# Altium PCB LM2596.PcbDoc
Units mm, origin at the board's own origin, x right, y up, seen from the top; angles counter-clockwise.
Board outline 48.51 x 33.02 mm, 2 copper layers (Top Layer, Bottom Layer); 7 components, 5 nets, 26 pads, 79 vias.
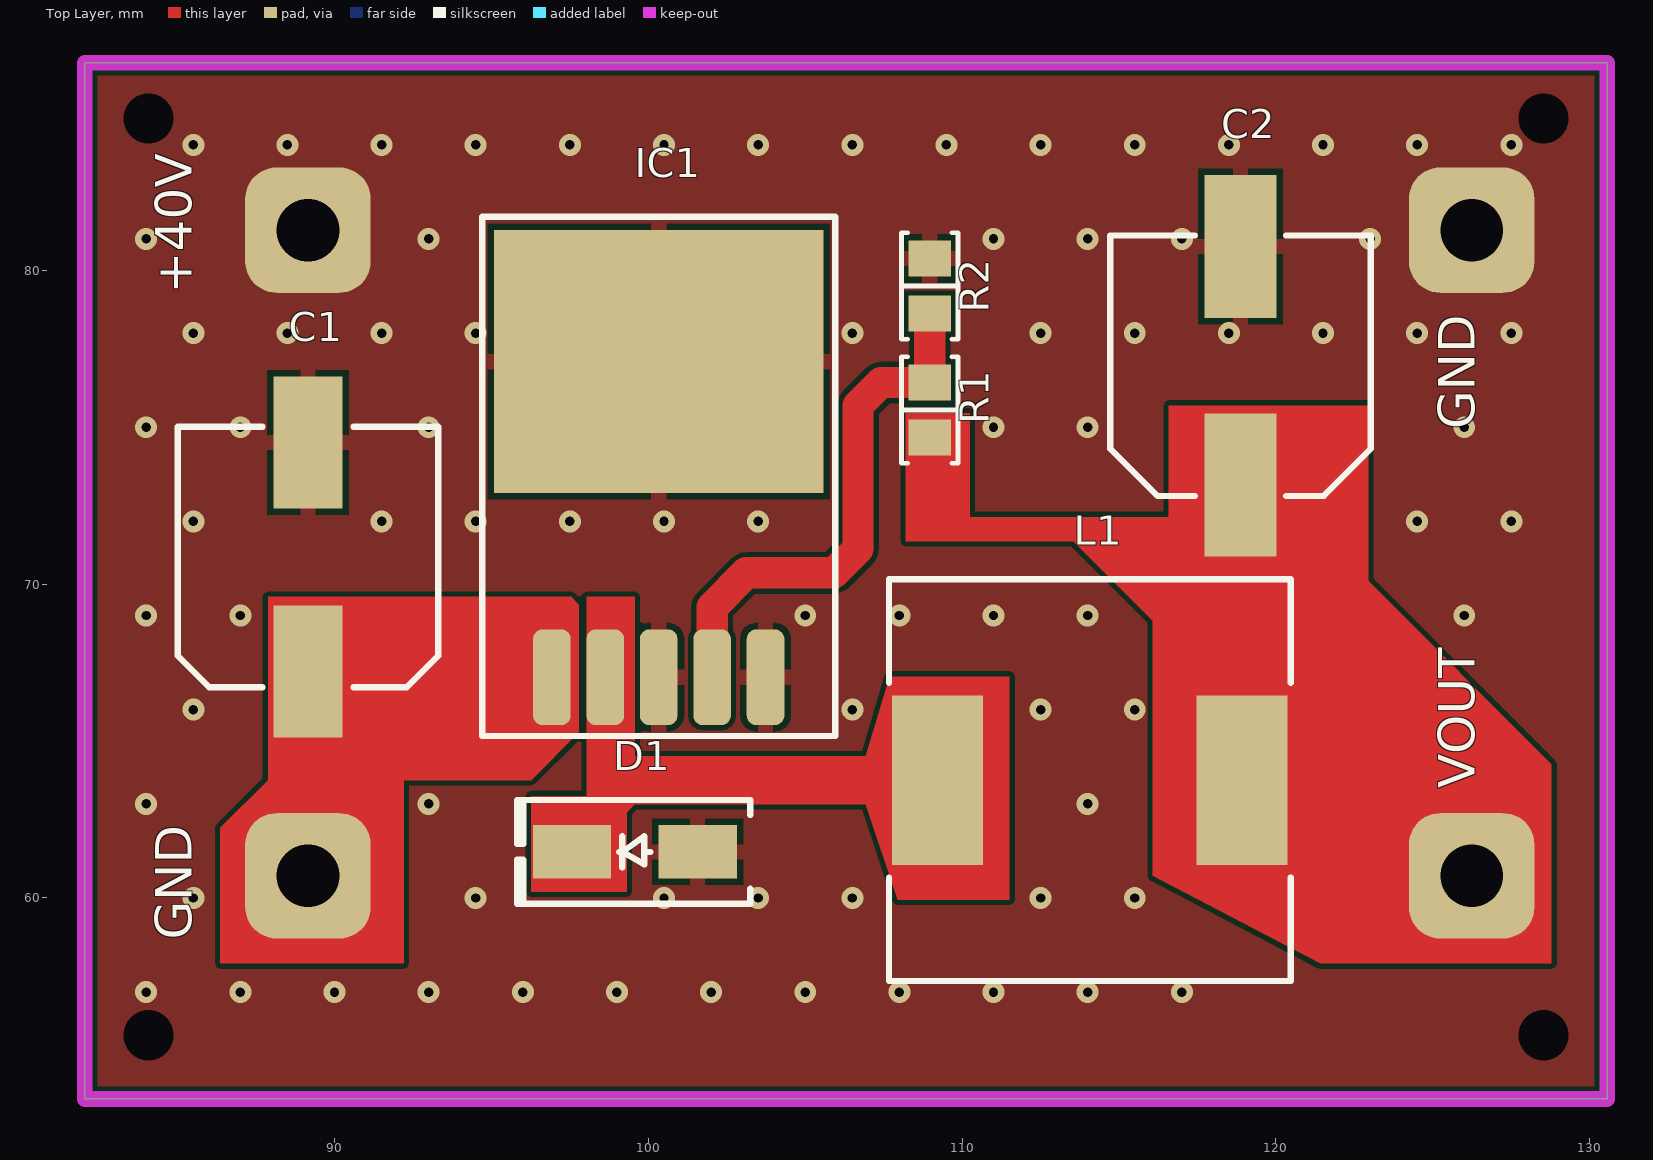
[diagram p0: Top Layer view]
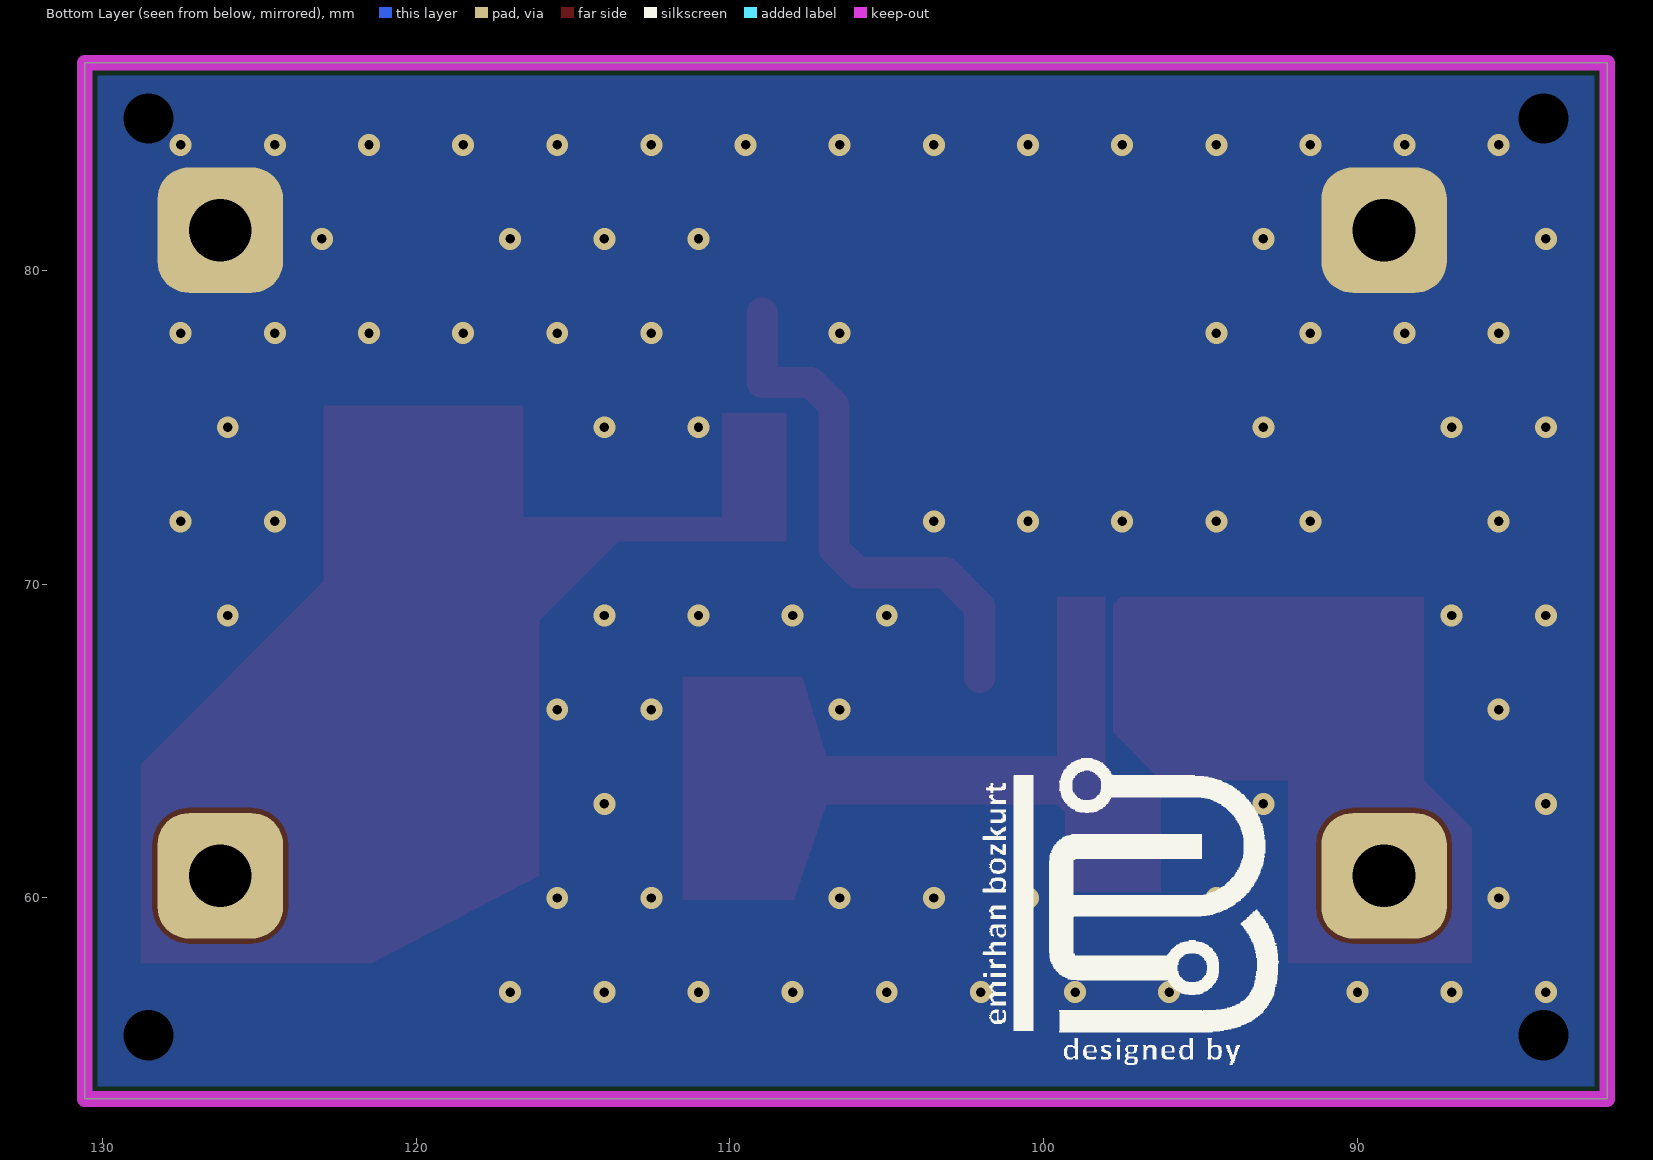
[diagram p1: Bottom Layer view, seen from below]
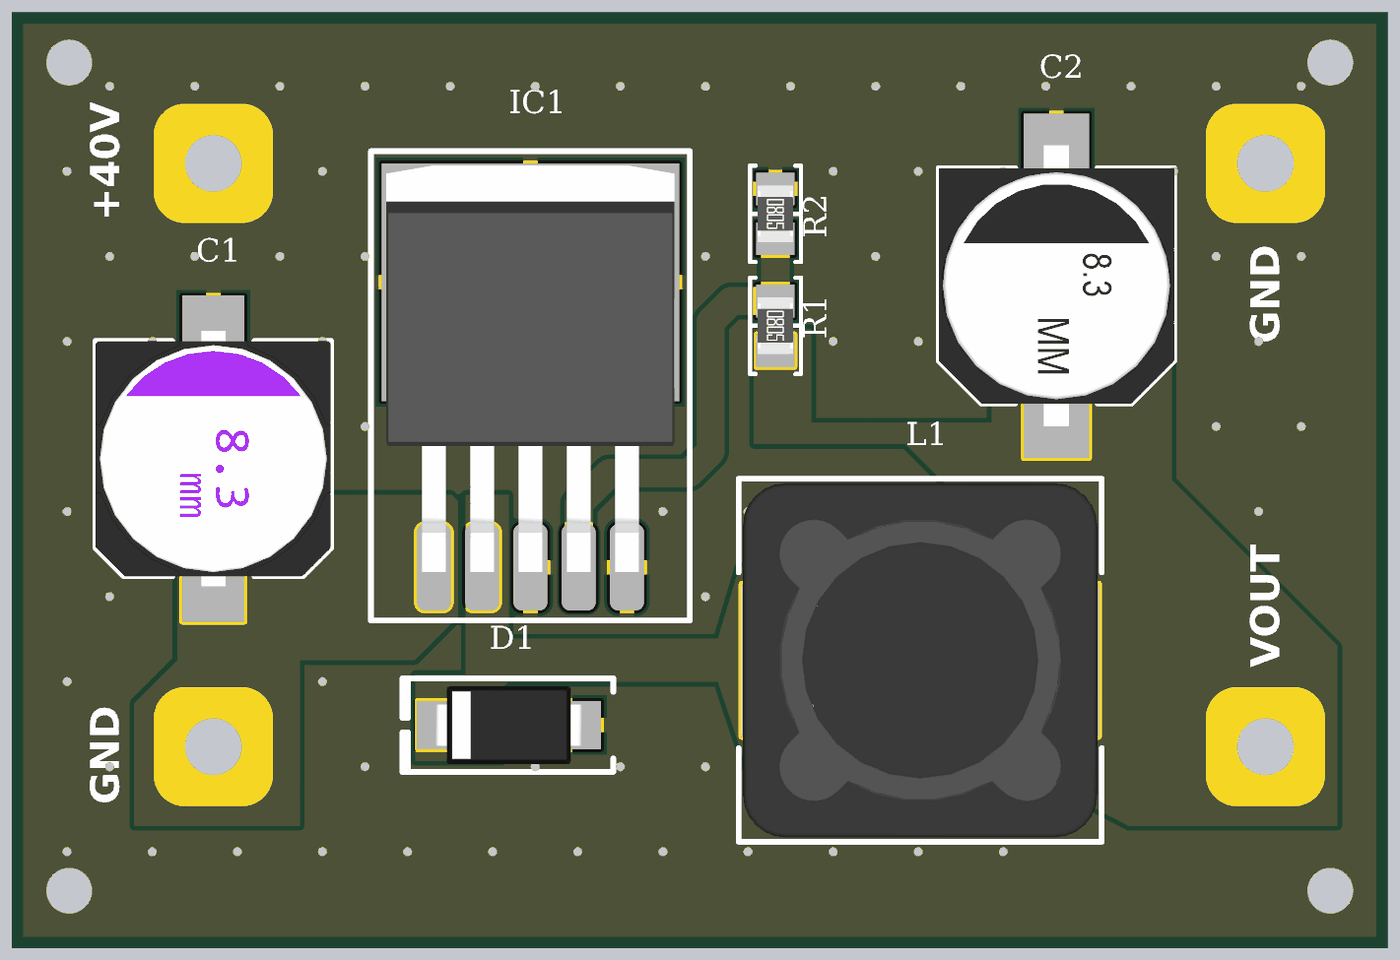
[diagram p2: 3D render of the assembled board from above, using the file's embedded part models]

## Layer stack, top to bottom
Top Solder: solder mask 0.0102, Solder Resist, Dk 3.5
Top Layer: signal copper 0.0356
Dielectric 1: dielectric 0.32, FR-4, Dk 4.8
Bottom Layer: signal copper 0.0356
Bottom Solder: solder mask 0.0102, Solder Resist, Dk 3.5

## Board outline
82.042,53.594 130.556,53.594 130.556,86.614 82.042,86.614

## Design rules (kind name [scope] priority, off if disabled: settings)
Clearance [All] p1: gap=0.152 ignorepadtopadclearanceinfootprint=FALSE
HoleSize [All] p1: absolutevalues=TRUE maxlimit=5 minlimit=0.025 maxpercent=80.000 minpercent=20.000
PolygonConnect [All] p1: thpad.connectstyle=Direct thpad.reliefconductorwidth=0.254 thpad.reliefentries=4 thpad.polygonreliefangle="90 Angle" thpad.airgapwidth=0.254 smdpad.connectstyle=Relief smdpad.reliefconductorwidth=0.5 smdpad.reliefentries=4 smdpad.polygonreliefangle="90 Angle" smdpad.airgapwidth=0.2 via.connectstyle=Direct via.reliefconductorwidth=0.254 via.reliefentries=4 via.polygonreliefangle="90 Angle" via.airgapwidth=0.254
RoutingVias [All] p1: holewidth=0.711 width=1.27 viastyle="Through Hole" minholewidth=0.711 minwidth=1.27 maxholewidth=0.711 maxwidth=1.27
SolderMaskExpansion [All] p1: expansion=0.102 istentingtop=FALSE
Width [All] p1: maxlimit=2 minlimit=0.152 preferedwidth=0.5 minimp=50.000000 maximp=50.000000 favimp=50.000000
29 further rules are at their usual default settings.

## Components (designator, comment, footprint, x,y, rotation, side; value= is the part's Value field where it differs from the comment)
C1 "100 µF" "CAP ALSMD POLY 8.3MM H10.5MM" 89.154,70.866 r90 top
C2 "220µF" "CAP ALSMD 8.3MM H10.5MM" 118.872,76.962 r90 top
D1 "ACDBA560-HF" "DO214AC SMA" 99.568,61.468 r180 top
IC1 "LM2596" D2PAK 100.33,66.784 r0 top
L1 "33 µH" "BOURNS SRR1280" 114.07,63.754 r0 top
R1 "10 kOhms" "RES 0805_2012" 108.966,75.551 r270 top
R2 "4.7 kOhms" "RES 0805_2012" 108.966,79.502 r270 top

## Footprints (in the part's own frame and the unit in brackets; to place one, negate y for a bottom-side part, rotate by r counter-clockwise, add the part's x,y. Pads: shape width x height; smd on the part's side, far side on the other; paste and mask are expansions set on the pad)
"BOURNS SRR1280" [mm] "Precision Wire Wound Inductor, 2-Leads, Body 12.50x12.50mm, IPC Medium Density"
  rect 2.9x5.4 smd: 1(-4.85,0) 2(4.85,0)
  silkscreen extent -6.4,-6.4 6.4,6.4, body extent -6.25,-6.25 6.25,6.25, height 7.9
"CAP ALSMD 8.3MM H10.5MM" [mm] "Aluminum Electrolytic Capacitor, Body 8.30x8.30x10.50mm, IPC Low Density"
  rect 4.55x2.3 smd: 1(-3.8,0) 2(3.8,0)
  silkscreen extent -4.15,-4.15 4.15,4.15, body extent -4.95,-4.15 4.95,4.15, height 10.5
"CAP ALSMD POLY 8.3MM H10.5MM" [mm] "Aluminum Electrolytic Capacitor, Body 8.30x8.30x10.5mm"
  rect 4.2x2.2 smd: 1(-3.65,0) 2(3.65,0)
  silkscreen extent -4.15,-4.15 4.15,4.15, body extent -4.5,-4.15 4.5,4.15, height 10.5
D2PAK [mm]
  rrect50% 1.2x3.05 smd: 1(-3.404,0.25) 2(-1.702,0.25) 3(0,0.25) 4(1.702,0.25) 5(3.404,0.25)
  rect 10.49x8.38 smd: 3(0,10.305)
  silkscreen extent -5.63,-1.63 5.63,14.92, body extent -5.08,0.07 5.08,14.43, height 4.77
"DO214AC SMA" [mm] "Molded Diode, 2-Leads, Body 4.30x2.60mm, IPC Medium Density"
  rect 2.5x1.7 smd: 1(-2,0) 2(2,0)
  silkscreen extent -3.68,-1.65 3.75,1.65, body extent -2.6,-1.37 2.6,1.37, height 2.4
"RES 0805_2012" [mm] "Chip Resistor, 2-Leads, Body 2.00x1.25mm, IPC Medium Density"
  rect 1.15x1.35 smd: 1(-0.875,0) 2(0.875,0)
  silkscreen extent -1.7,-0.9 1.7,0.9, body extent -1,-0.62 1,0.63, height 0.6

## Part data
C1: library part HHXJ630ARA101MJA0G, "CAP ALUM HYB 100UF 20% 63V SMD", ESR (Equivalent Series Resistance)=30mOhm, Lifetime @ Temp.="4000 Hrs @ 125°C", Manufacturer=Chemi-Con, Operating Temperature="-55°C ~ 125°C", Ratings=AEC-Q200, Ripple Current @ High Frequency="2 A @ 100 kHz", Ripple Current @ Low Frequency="300 mA @ 120 Hz", Supplier Part Number 1=565-HHXJ630ARA101MJA0G-ND, Tolerance=±20%, Voltage - Rated="63 V", Applications=Automotive, Capacitance="100 µF", ComponentLink2Description="DigiKey Link", ComponentLink2URL=https://www.digikey.com/en/products/detail/chemi-con/HHXJ630ARA101MJA0G/17875797, Height - Seated (Max)="0.413\" (10.50mm)", lastupdated="3.06.2024 20:17:01", Lifecycle Status=Active, Minimum Order=1, Mounting Type="Surface Mount", Packaging=Bulk, Part Number=HHXJ630ARA101MJA0G, partid=5811, Price=0.69, Series=HXJ, Size / Dimension="0.315\" Dia (8.00mm)", Supplier 1=DigiKey, Surface Mount Land Size="0.327\" L x 0.327\" W (8.30mm x 8.30mm)", Type=Hybrid
C2: library part UUR1V221MNL6GS, "CAP ALUM 220UF 20% 35V SMD", Device Package="Radial, Can - SMD", Lifetime @ Temp.="2000 Hrs @ 85°C", Manufacturer=Nichicon, Operating Temperature="-40°C ~ 85°C", Ripple Current @ High Frequency="319.8mA @ 10kHz", Ripple Current @ Low Frequency="246mA @ 120Hz", Supplier Part Number 1=493-6238-1-ND, Tolerance=±20%, Voltage - Rated=35V, Applications="General Purpose", Capacitance=220µF, ComponentLink1Description=Datasheet, ComponentLink1URL=http://nichicon-us.com/english/products/pdfs/e-uur.pdf, ComponentLink2Description="DigiKey Link", ComponentLink2URL=http://digikey.com/product-detail/en/nichicon/UUR1V221MNL6GS/493-6238-1-ND/3438751, Height - Seated (Max)="0.413\" (10.50mm)", lastupdated="2.09.2020 01:25:15", Lifecycle Status=Active, Minimum Order=1, Mounting Type="Surface Mount", Package / Case="Radial, Can - SMD", Packaging=TapeAndReel, Part Number=UUR1V221MNL6GS, Part Status=Active, partid=7568, Price=0.20, Series=UUR, Size / Dimension="0.315\" Dia (8.00mm)", Supplier 1=DigiKey, Surface Mount Land Size="0.327\" L x 0.327\" W (8.30mm x 8.30mm)"
D1: "DIODE SCHOTTKY 60V 5A DO214AC", Capacitance @ Vr, F="250pF @ 4V, 1MHz", Current - Average Rectified (Io)=5A, Current - Reverse Leakage @ Vr="500 µA @ 60 V", Manufacturer="Comchip Technology", Operating Temperature - Junction="-55°C ~ 125°C", Package / Case="DO-214AC, SMA", Supplier Device Package="DO-214AC (SMA)", Supplier Part Number 1=641-2078-1-ND, Voltage - DC Reverse (Vr) (Max)="60 V", Voltage - Forward (Vf) (Max) @ If="700 mV @ 5 A", ComponentLink1Description=Datasheet, ComponentLink1URL=http://www.comchiptech.com/admin/files/product/ACDBA560-HF%20RevA201382.pdf, ComponentLink2Description="DigiKey Link", ComponentLink2URL=https://www.digikey.com/en/products/detail/comchip-technology/ACDBA560-HF/7100903, Diode Type=Schottky, lastupdated="3.06.2024 19:54:37", Lifecycle Status=Active, Minimum Order=1, Mounting Type="Surface Mount", Packaging=TapeAndReel, Part Number=ACDBA560-HF, Part Status=Active, partid=1832, Price=0.15, Series=-, Speed="Fast Recovery =< 500ns, > 200mA (Io)", Supplier 1=DigiKey
IC1: library part LM2598
L1: library part SRR1280-330M, "FIXED IND 33UH 3.5A 57 MOHM SMD", Current - Saturation=3.3A, Current Rating (Amps)="3.5 A", DC Resistance (DCR)="57mOhm Max", Device Package=Nonstandard, Frequency - Self Resonant=9.5MHz, Manufacturer="Bourns Inc.", Operating Temperature="-40°C ~ 125°C", Q @ Freq="28 @ 2.52MHz", Supplier Part Number 1=SRR1280-330MCT-ND, Tolerance=±20%, Inductance Frequency - Test="100 kHz", ComponentLink1Description=Datasheet, ComponentLink1URL=https://www.bourns.com/docs/Product-Datasheets/SRR1280.pdf, ComponentLink2Description="DigiKey Link", ComponentLink2URL=https://www.digikey.com/en/products/detail/bourns-inc/SRR1280-330M/1969998, Height - Seated (Max)="0.315\" (8.00mm)", lastupdated="3.06.2024 20:02:37", Lifecycle Status=Active, Material - Core=Ferrite, Minimum Order=1, Mounting Type="Surface Mount", Package / Case=Nonstandard, Packaging=TapeAndReel, Part Number=SRR1280-330M, Part Status=Active, partid=25, Price=0.51, Series=SRR1280, Shielding=Shielded, Size / Dimension="0.492\" L x 0.492\" W (12.50mm x 12.50mm)", Supplier 1=DigiKey, Type="Drum Core, Wirewound", Inductance="33 µH"
R1: library part RNCP0805FTD10K0, "RES 10K OHM 1% 1/4W 0805", Device Package="0805 (2012 Metric)", Manufacturer="Stackpole Electronics Inc", Operating Temperature="-55°C ~ 155°C", Power (Watts)="0.25W, 1/4W", Supplier Device Package=0805, Supplier Part Number 1=RNCP0805FTD10K0CT-ND, Temperature Coefficient=±100ppm/°C, Tolerance=±1%, ComponentLink1Description=Datasheet, ComponentLink1URL=https://www.seielect.com/catalog/sei-rncp.pdf, ComponentLink2Description="DigiKey Link", ComponentLink2URL=https://www.digikey.com/en/products/detail/stackpole-electronics-inc/RNCP0805FTD10K0/2240262, Composition="Thin Film", Features=Anti-Sulfur, Height - Seated (Max)="0.025\" (0.65mm)", lastupdated="8.02.2024 21:02:37", Lifecycle Status=Active, Minimum Order=1, Number of Terminations=2, Package / Case="0805 (2012 Metric)", Packaging=TapeAndReel, Part Number=RNCP0805FTD10K0, Part Status=Active, partid=28021, Price=0.01, Resistance="10 kOhms", Series=RNCP, Size / Dimension="0.079\" L x 0.049\" W (2.00mm x 1.25mm)", Supplier 1=DigiKey
R2: library part CRCW08054K70FKEAHP, "RES SMD 4.7K OHM 1% 1/2W 0805", Device Package="0805 (2012 Metric)", Manufacturer="Vishay Dale", Operating Temperature="-55°C ~ 155°C", Power (Watts)="0.5W, 1/2W", Ratings=AEC-Q200, Supplier Device Package=0805, Supplier Part Number 1=541-4.70KTCT-ND, Temperature Coefficient=±100ppm/°C, Tolerance=±1%, ComponentLink1Description=Datasheet, ComponentLink1URL=http://www.vishay.com/docs/20043/crcwhpe3.pdf, ComponentLink2Description="DigiKey Link", ComponentLink2URL=https://www.digikey.com/en/products/detail/vishay-dale/CRCW08054K70FKEAHP/2222346, Composition="Thick Film", Features="Automotive AEC-Q200, Pulse Withstanding", Height - Seated (Max)="0.020\" (0.50mm)", lastupdated="8.02.2024 21:02:28", Lifecycle Status=Active, Minimum Order=1, Number of Terminations=2, Package / Case="0805 (2012 Metric)", Packaging=TapeAndReel, Part Number=CRCW08054K70FKEAHP, Part Status=Active, partid=30337, Price=0.02, Resistance="4.7 kOhms", Series=CRCW-HP, Size / Dimension="0.079\" L x 0.049\" W (2.00mm x 1.25mm)", Supplier 1=DigiKey

## Free pads (board coordinates)
  rrect50% 4x4 hole 2: VIN(89.154,60.706) VOUT(126.238,60.706) ""(89.154,81.28) ""(126.238,81.28)
  round 0 hole 1.6: ""(84.074,55.626) ""(84.074,84.836) ""(128.524,55.626) ""(128.524,84.836)

## Via types
v1: diameter 0.7, hole 0.3, Top Layer to Bottom Layer, tented both sides, 79 vias

## Nets (pads, with @x,y where several pads share a name; then routed paths per layer and width w, separated by ;. In a path a pad name is that pad's centre, name@x,y a point inside that pad or via, vN(x,y) a via of type N, cw(c..) or ccw(c..) an arc to the next point about the centre after c; other vN are vias at no path point)
+12: C2.1 L1.2 pad.VOUT R1.2
FB: IC1.4 R1.1 R2.2 | length 17
  Top Layer w1: IC1.4 102.032,69.266 103.124,70.358 105.918,70.358 106.68,71.12 106.68,75.692 107.414,76.426 108.54,76.426 R1.1 R2.2
GND: C1.2 C2.2 D1.1 IC1.3 IC1.5 pad. R2.1
  other v1: 84,57 87,57 90,57 93,57 96,57 99,57 102,57 105,57 108,57 111,57 114,57 117,57 85.5,60 94.5,60 100.5,60 103.5,60 106.5,60 112.5,60 115.5,60 84,63 93,63 114,63 85.5,66 106.5,66 112.5,66 115.5,66 84,69 87,69 105,69 108,69 111,69 114,69 126,69 85.5,72 91.5,72 94.5,72 97.5,72 100.5,72 103.5,72 124.5,72 127.5,72 84,75 87,75 93,75 111,75 114,75 126,75 85.5,78 88.5,78 91.5,78 94.5,78 106.5,78 112.5,78 115.5,78 118.5,78 121.5,78 124.5,78 127.5,78 84,81 93,81 111,81 114,81 117,81 123,81 85.5,84 88.5,84 91.5,84 94.5,84 97.5,84 100.5,84 103.5,84 106.5,84 109.5,84 112.5,84 115.5,84 118.5,84 121.5,84 124.5,84 127.5,84
NetD1_2: D1.2 IC1.2 L1.1
VCC: C1.1 IC1.1 pad.VIN

## Polygon pours and split planes (outlines as drawn)
GND on Bottom Layer "DGND_L02_P000" (solid, pour order 0): 130.556,86.614 130.556,53.594 82.042,53.594 82.042,86.614
GND on Top Layer "DGND_L02_P000" (solid, pour order 2): 130.556,86.614 130.556,53.594 82.042,53.594 82.042,86.614

## Keep-outs
Keep-Out Layer:
  the board outline again, w0.5

## Other copper
Top Layer:
  region net +12: 108.204,75.438 110.236,75.438 110.236,72.136 116.586,72.136 116.586,75.692 117.094,75.692 117.602,75.692 122.936,75.692 122.936,70.104 128.778,64.262 128.778,57.912 121.412,57.912 116.078,60.706 116.078,68.834 113.538,71.374 108.204,71.374
  region net NetD1_2: 98.044,69.596 98.044,63.246 96.266,63.246 96.266,60.198 99.314,60.198 99.314,62.738 99.568,62.992 106.934,62.992 107.95,59.944 111.506,59.944 111.506,66.802 111.506,67.056 107.696,67.056 106.934,64.516 99.568,64.516 99.568,69.596
  region net VCC: 87.884,69.596 87.884,63.754 86.36,62.23 86.36,57.912 92.202,57.912 92.202,63.754 96.266,63.754 97.79,65.278 97.79,69.342 97.536,69.596

## Silkscreen, mask and mechanical layers (free items; w line width, h text height)
Top Overlay:
  text "+40V" at 85.83,79.248 h2 r90
  text "GND" at 126.72,74.93 h2 r90
  text "VOUT" at 126.72,63.5 h2 r90
  text "GND" at 85.826,58.674 h2 r90
Bottom Overlay:
  drawing of 29 lines, arcs and shapes, not listed